# EAGLE board cos POC (EAGLE 9.4.0)
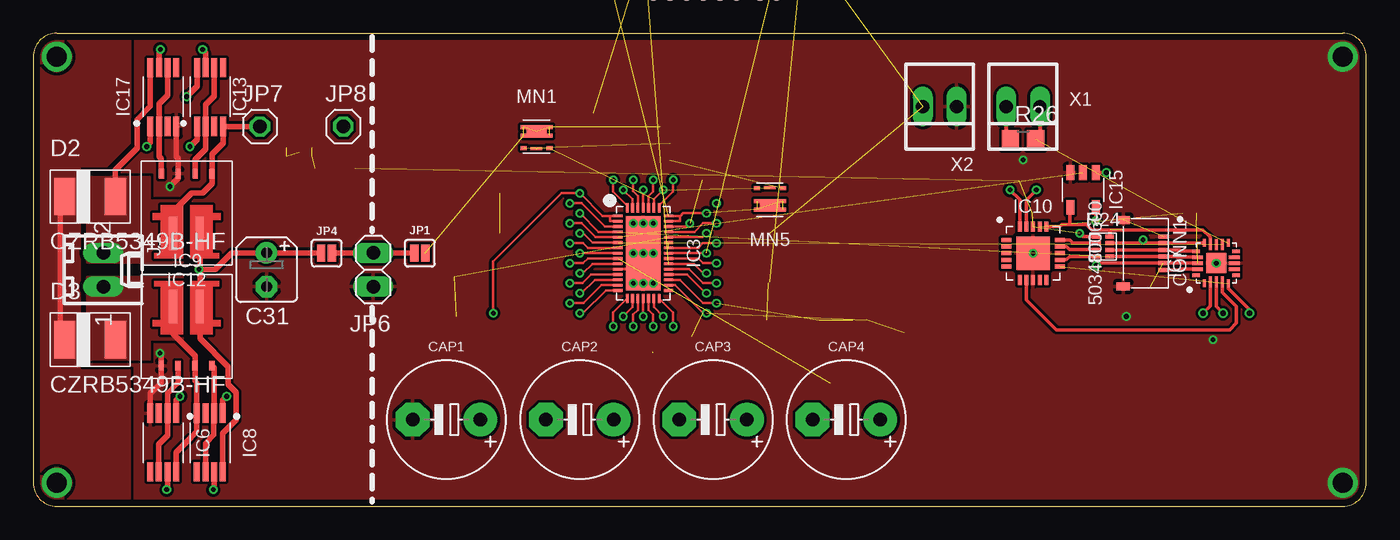
[diagram p0: board, top side]
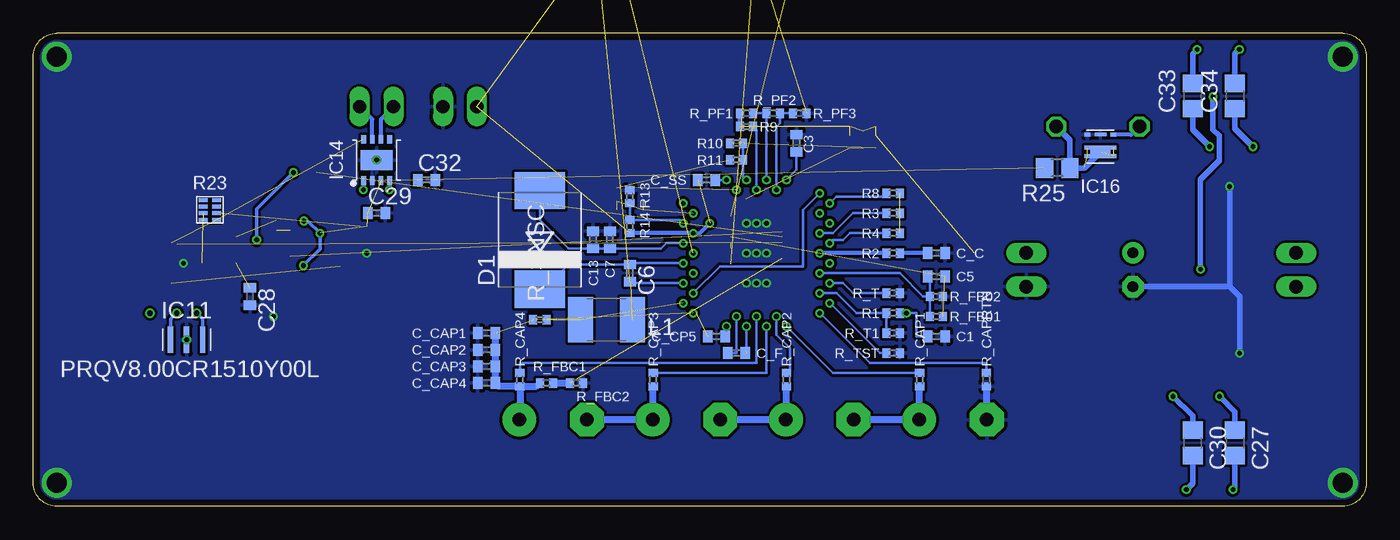
[diagram p1: board, bottom side, seen from below]

Size 100 x 35.5 mm. Coordinates in mm from the lower left corner, seen from the top.
Outline: 1.75,0 98.25,0 arc90 100,1.75 100,33.75 arc90 98.25,35.5 1.75,35.5 arc90 0,33.75 0,1.75 arc90 1.75,0
Copper layers (1*16): Top 0.035mm / dielectric 1.5mm / Bottom 0.035mm
Design rules "markovac_2layer": minimum track width 0.2mm, minimum drill 0.35mm, track to track 0.2mm, track to pad 0.2mm, pad to pad 0.2mm, via to via 0.2mm, smd to smd 0.2mm, copper to edge 0.5mm, drill to drill 8mil, minimum pad ring 0.15mm, minimum via ring 0.15mm, stop-mask expansion 4mil, vias tented up to drill 0.34mm, thermal gap 10mil
Net classes: 0 GND: width 0.3 mm, drill 0.35 mm, clearance 0.2 mm; 1 VCC: width 0.3 mm, drill 0.35 mm, clearance 0.2 mm; 2 signal: width 0.2 mm, drill 0.35 mm, clearance 0.2 mm; 5 currett-0.45: width 0.45 mm, drill 0.35 mm, clearance 0.2 mm

## Footprints (pad centres in the part's own frame; a part is rotated, then mirrored left to right if it is on the bottom)
C0402 = smd 0.7 x 0.9: 1 -0.65,0; 2 0.65,0
C0805 = smd 1.3 x 1.5: 1 -0.95,0; 2 0.95,0
B45181A = drill 0.813 pad 1.6: + -1.27,0 | drill 0.813 pad 1.6 octagon: - 1.27,0
E5-8,5 = drill 1.016 pad 2.54: + -2.54,0 | drill 1.016 pad 2.54 octagon: - 2.54,0
SMT = smd 0.3 x 0.7: 1 -1.25,1.27; 2 -0.75,1.27; 3 -0.25,1.27; 4 0.25,1.27; 5 0.75,1.27; 6 1.25,1.27 | smd 0.6 x 1: GND1 -2.5,-1.73; GND2 2.5,-1.73
SMC = smd 2.8 x 3.8: A 3.7,0; C -3.7,0
DO-214 = smd 1.6 x 2.8: AN 1.9,0; CAT -1.9,0
QFN44 = smd 0.2 x 0.7: 1-CAP_SLCT0 -2.8,-1.9; 2-CAP_SLCT1 -2.4,-1.9; 3-VINGD -2,-1.9; 4-SCL -1.6,-1.9; 5-SDA -1.2,-1.9; 6-!SMBALERT! -0.8,-1.9; 7-CAPGD -0.4,-1.9; 8-VC 0,-1.9; 9-CAPFB 0.4,-1.9; 10-OUTFB 0.8,-1.9; 11SGND 1.2,-1.9; 12-RT 1.6,-1.9; 13-GPI 2,-1.9; 14-ITST 2.4,-1.9; 15-CAPRTN 2.8,-1.9; 23-OUTFET 2.8,1.9; 24-VCAP 2.4,1.9; 25-ICAP 2,1.9; 26-VCC2P5 1.6,1.9; 27-SW 1.2,1.9; 28-TGATE 0.8,1.9; 29-BST 0.4,1.9; 30-BGATE 0,1.9; 31-DRVCC -0.4,1.9; 32-INTVCC -0.8,1.9; 33-VOUT -1.2,1.9; 34-RETRYB -1.6,1.9; 35-ISNSM -2,1.9; 36-ISNSP_CHG -2.4,1.9; 37-ISNS_HS -2.8,1.9 | smd 0.7 x 0.2: 16-CAP1 3.4,-1.2; 17-CAP2 3.4,-0.8; 18-CAP3 3.4,-0.4; 19-CAP4 3.4,0; 20-CFP 3.4,0.4; 21-CFN 3.4,0.8; 22-VCAPP5 3.4,1.2; 38_CSS -3.4,1.2; 39_SRC -3.4,0.8; 40-HS_GATE -3.4,0.4; 41-VIN -3.4,0; 42-UV -3.4,-0.4; 43-OV -3.4,-0.8; 44-CTIMER -3.4,-1.2 | drill 0.35: GND2 -2.25,0.75; GND3 0,0.75; GND4 2.25,0.75; GND5 -2.25,0; GND6 0,0; GND7 2.25,0; GND8 -2.25,-0.75; GND9 0,-0.75; GND10 2.25,-0.75 | smd 5.6 x 2.6: PGND 0,0
VSSOP-8 = smd 0.45 x 1.45: ANODE 0.98,-2.23; CATHODE -0.97,2.17; GATE_DRIVE 0.33,2.17; GATE_PULLD -0.32,-2.23; NC1 0.33,-2.23; NC2 0.98,2.17; VCAPH -0.32,2.17; VCAPL -0.97,-2.23
VQFN-20 = smd 0.55 x 0.25: 1 -1.52,0.9; 5 -1.52,-0.9; 11 1.52,-0.9; 15 1.52,0.9 | smd 0.8 x 0.25: 2 -1.4,0.45; 3 -1.4,0; 4 -1.4,-0.45; 12 1.4,-0.45; 13 1.4,0; 14 1.4,0.45 | smd 0.25 x 0.55: 6 -0.9,-1.48; 10 0.9,-1.48; 16 0.9,1.52; 20 -0.9,1.52 | smd 0.25 x 0.8: 7 -0.45,-1.35; 8 0,-1.35; 9 0.45,-1.35; 17 0.45,1.4; 18 0,1.4; 19 -0.45,1.4 | smd 1.5 x 1.5: GND 0,0
SO-8L = smd 0.58 x 2.5: D1 -1,1.5; D2 1,1.5 | smd 0.4 x 0.7: G1 -0.64,-2.95; G2 1.9,-2.95; S1 -1.91,-2.95; S2 0.63,-2.95
QFN20 = smd 0.3 x 0.75: !CS! 1,2; !RESET! 0.5,2; !RX0BF! 1,-2; !RX1BF! 0.5,-2; GND6 0,-2; OSC1 -0.5,-2; OSC2 -1,-2; RXCAN -1,2; TXCAN -0.5,2; VDD 0,2 | smd 0.75 x 0.3: !INT! 2,-1; !TX0RTS! -2,0.5; !TX1RTS! -2,0; !TX2RTS! -2,-1; CLKOUT -2,1; NC1 -2,-0.5; NC2 2,0; SCK 2,-0.5; SI 2,0.5; SO 2,1 | smd 2.5 x 2.5: GND 0,0
SMT' = smd 0.4 x 2: GND 0,0; XTAL1 -1.2,0; XTAL2 1.2,0
DFN10 = smd 0.35 x 0.65: CANH -0.325,1.55; CANL 0.325,1.55; RXD 0.975,-1.55; SPLIT 0.975,1.55; STBY -0.975,1.55; TXD -0.975,-1.55; VDD 0.325,-1.55; VSS -0.325,-1.55 | smd 2.4 x 1.5: GND 0,0
SOT-23 = smd 1.1 x 0.6: 1 -1.3,0.95; 2 -1.3,0; 3 -1.3,-0.95; 4 1.3,-0.95; 5 1.3,0.95
SC-70-6 = smd 0.45 x 0.3: 1D -0.975,0.725; 2D -0.975,0.075; 3G -0.975,-0.88; 4S 0.975,-0.88; 5D 0.975,0.075; 6D 0.975,0.725 | smd 1.5 x 0.95: D 0,0.4 | smd 0.87 x 0.23: S 0,-0.915
6410-02 = drill 1.016 long: 1 1.27,0; 2 -1.27,0
SMT-JUMPER_2_NO_SILK = smd 0.635 x 1.27: 1 -0.406,0; 2 0.406,0
1X02 = drill 1.016 long: 1 -1.27,0; 2 1.27,0
1X01 = drill 1.016 octagon: 1 0,0
L1812 = smd 1.9 x 3.4: 1 -1.95,0; 2 1.95,0
R0402 = smd 0.6 x 0.7: 1 -0.5,0; 2 0.5,0
0402-4R = smd 0.65 x 0.3: 1 -0.5,-0.75; 2 0.5,-0.75; 3 -0.5,-0.25; 4 0.5,-0.25; 5 -0.5,0.25; 6 0.5,0.25; 7 -0.5,0.75; 8 0.5,0.75
R0805 = smd 1.3 x 1.5: 1 -0.95,0; 2 0.95,0
22-23-2021 = drill 1 long: 1 -1.27,0; 2 1.27,0

## Placement (x,y rotation side)
C1  1μF  [C0402]  32.25,12.75 0 bottom
C3  4.7nF  [C0402]  42.75,27.25 270 bottom
C5  100pF  [C0402]  32.25,17.25 180 bottom
C6  0.1μF  [C0402]  55.25,17.5 270 bottom
C7  0.1μF  [C0402]  56.75,20 90 bottom
C13  4.7μF  [C0402]  58,20 90 bottom
C27  0.1μF  [C0805]  9.84,4.76 270 bottom
C28  0.1μF  [C0402]  83.75,15.75 270 bottom
C29  0.1μF  [C0402]  74.25,22 0 bottom
C30  0.1μF  [C0805]  13.02,4.76 270 bottom
C31  [B45181A]  17.5,17.75 270 top
C32  0.1μF  [C0402]  70.5,24.5 0 bottom
C33  0.1μF  [C0805]  13.02,30.8 90 bottom
C34  0.1μF  [C0805]  9.84,30.8 90 bottom
C_C  4.7nF  [C0402]  32.25,19 0 bottom
C_CAP1  22μF  [C0402]  66,13 180 bottom
C_CAP2  22μF  [C0402]  66,11.75 180 bottom
C_CAP3  22μF  [C0402]  66,10.5 180 bottom
C_CAP4  22μF  [C0402]  66,9.25 180 bottom
C_CP5  1μF  [C0402]  48.75,12.75 0 bottom
C_F  0.1μF  [C0402]  47.25,11.5 180 bottom
C_OUT1-1  100μF  [C0402]  46.5,44.5 270 top  (outside the outline)
C_OUT1-2  100μF  [C0402]  47.75,44.5 270 top  (outside the outline)
C_OUT1-3  100μF  [C0402]  49,44.5 270 top  (outside the outline)
C_OUT1-4  100μF  [C0402]  50.25,44.5 270 top  (outside the outline)
C_OUT1-5  100μF  [C0402]  51.5,44.5 270 top  (outside the outline)
C_OUT1-6  100μF  [C0402]  52.75,44.5 270 top  (outside the outline)
C_OUT2-1  2.2μF  [C0402]  54.5,44.5 270 top  (outside the outline)
C_OUT2-2  2.2μF  [C0402]  55.75,44.5 270 top  (outside the outline)
C_SS  22μF  [C0402]  49.5,24.5 0 bottom
CAP1  15F  [E5-8,5]  31,6.5 180 top
CAP2  15F  [E5-8,5]  41,6.5 180 top
CAP3  15F  [E5-8,5]  51,6.5 180 top
CAP4  15F  [E5-8,5]  61,6.5 180 top
CONN1  5034800600  [SMT]  83.5,19 270 top
D1  [SMC]  62,20 90 bottom
D2  CZRB5349B-HF  [DO-214]  4.25,23.25 0 top
D3  CZRB5349B-HF  [DO-214]  4.25,12.5 0 top
IC3  [QFN44]  45.75,19 270 top
IC6  LM74670QDGKRQ1  [VSSOP-8]  9.75,4.75 180 top
IC7  ATTINY4313-MMH  [VQFN-20]  88.75,18.25 90 top
IC8  LM74670QDGKRQ1  [VSSOP-8]  13.25,4.75 180 top
IC9  SQJ960EP N-FET  [SO-8L]  11.5,13.5 0 top
IC10  MCP2515  [QFN20]  75,19 0 top
IC11  PRQV8.00CR1510Y00L  [SMT']  88.5,12.5 0 bottom
IC12  SQJ960EP N-FET  [SO-8L]  11.5,22 180 top
IC13  LM74670QDGKRQ1  [VSSOP-8]  13.25,30.75 0 top
IC14  MCP2561-2  [DFN10]  74.25,26 0 bottom
IC15  [SOT-23]  78.75,23.75 270 top
IC16  [SC-70-6]  19.94,27 180 bottom
IC17  LM74670QDGKRQ1  [VSSOP-8]  9.75,30.75 0 top
J1  22-27-2021-02  [6410-02]  5.25,17.75 270 top
JP1  JUMPER-SMT_2_NO_SILK  [SMT-JUMPER_2_NO_SILK]  29,19 0 top
JP4  JUMPER-SMT_2_NO_SILK  [SMT-JUMPER_2_NO_SILK]  22,19 0 top
JP6  [1X02]  25.5,17.75 270 top
JP7  [1X01]  17,28.5 0 top
JP8  [1X01]  23.25,28.5 0 top
L1  10μH  [L1812]  57,14 180 bottom
MN1  [SC-70-6]  37.75,27.75 0 top
MN2  [SC-70-6]  44.5,45.75 180 top  (outside the outline)
MN3  [SC-70-6]  57.75,43.75 270 top  (outside the outline)
MN5  [SC-70-6]  55.25,23 180 top
R1  100k  [R0402]  35.5,14.5 180 bottom
R2  2k  [R0402]  35.5,19 0 bottom
R3  10k  [R0402]  35.5,22 180 bottom
R4  10k  [R0402]  35.5,20.5 180 bottom
R8  10k  [R0402]  35.5,23.5 180 bottom
R9  100Ω  [R0402]  46.5,28.5 180 bottom
R10  10Ω  [R0402]  47.25,27.25 0 bottom
R11  10Ω  [R0402]  47.25,26 180 bottom
R13  10k  [R0402]  55.25,23.25 90 bottom
R14  10k  [R0402]  55.25,21 270 bottom
R23  741X083102JP 10k  [0402-4R]  86.75,22.25 0 bottom
R24  741X083331JP 330R  [0402-4R]  80.25,19.5 0 top
R25  330k  [R0805]  23.18,25.4 180 bottom
R26  120  [R0805]  74.25,27.5 0 top
R_CAP1  2.7Ω  [R0402]  33.5,9.5 270 bottom
R_CAP2  2.7Ω  [R0402]  43.5,9.5 270 bottom
R_CAP3  2.7Ω  [R0402]  53.5,9.5 270 bottom
R_CAP4  2.7Ω  [R0402]  63.5,9.5 270 bottom
R_CAPRTN  2.7Ω  [R0402]  28.5,9.5 270 bottom
R_FB01  400k  [R0402]  32.25,14.25 180 bottom
R_FB02  100k  [R0402]  32.25,15.75 0 bottom
R_FBC1  732k  [R0402]  61.5,9.25 180 bottom
R_FBC2  274k  [R0402]  59.25,9.25 180 bottom
R_PF1  30.1k  [R0402]  46.5,29.5 0 bottom
R_PF2  10k  [R0402]  44.5,29.5 0 bottom
R_PF3  30.1k  [R0402]  42.5,29.5 0 bottom
R_SNSC  0.003Ω  [R0402]  62,14 180 bottom
R_SNSI  0.064Ω  [R0402]  42.25,45.5 0 top  (outside the outline)
R_T  88.7k  [R0402]  35.5,16 0 bottom
R_T1  100k THERM  [R0402]  35.5,13 0 bottom
R_TST  20Ω  [R0402]  35.5,11.5 0 bottom
X1  CAN  [22-23-2021]  74.25,30 180 top
X2  BAT  [22-23-2021]  68,30 180 top

## Library data of the parts
C1 C3 C5-C7 C13 C27-C34 C_C C_CAP1-C_CAP4 C_CP5 C_F C_OUT1-1-C_OUT1-6 C_OUT2-1 C_OUT2-2 C_SS CAP1-CAP4 = rcl; SPICEPREFIX: C
CONN1 = 5034800600 FPC Connector
D1 = diode
D2 D3 = zener
IC3 = LTC3351f - Hot Swappable Supercapacitor Charger, Backup Controller and  System Monitor
IC6 IC8 IC13 IC17 = LM74670 - Smart Diode Rectifier Controller
IC7 = ATtiny4313 microcontroller
IC9 IC12 = SQJ96XEP - MosFET
IC10 = MCP2515-I-ML - Standalonce CAN Controller with SPI Interface
IC11 = PRQV8.00CR1510Y00L - 8MHz resonator
IC14 = MCP2561-2 - High-Speed CAN Transceiver
IC15 = TS5A1066 Analogue Switch IC
IC16 MN1-MN3 MN5 = SIA456DJ-T1-GE3  N-Fet
J1 = con-molex; MF: MOLEX; OC_FARNELL: unknown; OC_NEWARK: unknown
JP1 JP4 = SparkFun-Jumpers
JP6-JP8 = pinhead
L1 = rcl; SPICEPREFIX: L
R1-R4 R8-R11 R13 R14 R25 R26 R_CAP1-R_CAP4 R_CAPRTN R_FB01 R_FB02 R_FBC1 R_FBC2 R_PF1-R_PF3 R_SNSC R_SNSI R_T R_T1 R_TST = rcl; SPICEPREFIX: R
R23 R24 = 74x-1133528 Resistor Array
X1 X2 = con-molex; MF: MOLEX; MPN: 22-23-2021; OC_FARNELL: 1462926; OC_NEWARK: 25C3832

## Nets
5V0: C28.1 C29.1 C32.1 CONN1.5 IC7.18 IC10.VDD IC14.VDD IC15.5 R23.1 R23.3 R24.7 R25.2
6V0 [currett-0.45]: C5.1 C_OUT1-1.1 C_OUT1-2.1 C_OUT1-3.1 C_OUT1-4.1 C_OUT1-5.1 C_OUT1-6.1 C_OUT2-1.1 C_OUT2-2.1 C_SS.1 IC3.33-VOUT IC3.35-ISNSM MN2.1D MN2.2D MN2.5D MN2.6D MN2.D R14.2 R_FB01.1 R_SNSI.2 X2.2
!PFO! [signal]: IC3.3-VINGD R8.2
!SMBALERT! [signal]: IC3.6-!SMBALERT! IC7.12 R3.2
BGATE [signal]: IC3.30-BGATE MN3.3G
BST [signal]: C6.1 D1.C IC3.29-BST
CANH: IC14.CANH R26.2 X1.1
CANL: IC14.CANL R26.1 X1.2
CAP1 [signal]: IC3.16-CAP1 R_CAP1.1
CAP2 [signal]: IC3.17-CAP2 R_CAP2.1
CAP3 [signal]: IC3.18-CAP3 R_CAP3.1
CAP4 [signal]: IC3.19-CAP4 R_CAP4.1
CAPFB: IC3.9-CAPFB R_FBC1.1 R_FBC2.2
CAPGD [signal]: IC3.7-CAPGD R4.2
CAPRTN [signal]: IC3.15-CAPRTN R_CAPRTN.1
CFN [signal]: C_F.2 IC3.21-CFN
CFP [signal]: C_F.1 IC3.20-CFP
CKOUT: IC7.4 IC10.OSC1
CSS [signal]: C_SS.2 IC3.38_CSS
CTIMER [signal]: C3.2 IC3.44-CTIMER
DEBUGWIRE/RESET [signal]: CONN1.6 IC7.19
DRVCC [signal]: C7.1 C13.1 D1.A IC3.31-DRVCC IC3.32-INTVCC
DYNAMO_1: D3.AN IC6.CATHODE IC8.ANODE IC9.D1 IC9.S2 J1.1
DYNAMO_2: D2.AN IC12.D2 IC12.S1 IC13.ANODE IC16.3G IC17.CATHODE J1.2 JP7.1
FET1_G: IC6.GATE_DRIVE IC6.GATE_PULLD IC9.G1
FET2_G: IC8.GATE_DRIVE IC8.GATE_PULLD IC9.G2
FET3_G: IC12.G1 IC13.GATE_DRIVE IC13.GATE_PULLD
FET4_G: IC12.G2 IC17.GATE_DRIVE IC17.GATE_PULLD
GND: C1.2 C3.1 C7.2 C13.2 C28.2 C29.2 C31.- C32.2 C_C.2 C_CAP1.2 C_CAP2.2 C_CAP3.2 C_CAP4.2 C_OUT1-1.2 C_OUT1-2.2 C_OUT1-3.2 C_OUT1-4.2 C_OUT1-5.2 C_OUT1-6.2 C_OUT2-1.2 C_OUT2-2.2 CAP1.- CONN1.1 CONN1.GND1 CONN1.GND2 IC3.11SGND IC3.GND2 IC3.GND3 IC3.GND4 IC3.GND5 IC3.GND6 IC3.GND7 IC3.GND8 IC3.GND9 IC3.GND10 IC3.PGND IC6.ANODE IC7.8 IC7.GND IC9.S1 IC10.GND IC10.GND6 IC11.GND IC12.S2 IC14.GND IC14.VSS IC15.3 IC16.4S IC16.S IC17.ANODE JP6.2 MN3.4S MN3.S R13.2 R_CAPRTN.2 R_FB02.2 R_FBC2.1 R_PF3.2 R_T1.2 R_T.2 R_TST.2 X2.1
GPI [signal]: IC3.13-GPI R1.2 R_T1.1
I2C_SDA [signal]: IC3.5-SDA IC15.2
ICAP [signal]: IC3.25-ICAP L1.2 R_SNSC.1
ICSP_DI/MISO [signal]: CONN1.2 IC7.15 IC15.1 R24.6
ICSP_DO/MOSI [signal]: CONN1.3 IC7.16 R24.4
ICSP_SCK [signal]: CONN1.4 IC3.4-SCL IC7.17 R24.2
INT1: IC7.5 IC10.!INT!
ITST [signal]: IC3.14-ITST R_TST.1
N$1 [VCC]: IC3.39_SRC MN1.4S MN1.S MN5.4S MN5.S
N$2: MN1.3G R10.1
N$3: C27.2 IC6.VCAPH
N$4: JP1.1 JP4.2 JP6.1
N$6 [VCC]: IC3.36-ISNSP_CHG IC3.37-ISNS_HS MN5.1D MN5.2D MN5.5D MN5.6D MN5.D R_SNSI.1
N$7 [signal]: CAP3.+ CAP4.- R_CAP3.2
N$8 [signal]: CAP2.+ CAP3.- R_CAP2.2
N$9: C27.1 IC6.VCAPL
N$10: C34.2 IC17.VCAPH
N$11: C34.1 IC17.VCAPL
N$12: C33.1 IC13.VCAPL
N$13: C33.2 IC13.VCAPH
N$14: C30.1 IC8.VCAPL
N$15: C30.2 IC8.VCAPH
N$16 [signal]: CAP1.+ CAP2.- R_CAP1.2
N$18: MN5.3G R11.2
N$19: C_C.1 R2.2
N$20 [signal]: IC3.40-HS_GATE R10.2 R11.1
N$27 [signal]: IC3.41-VIN R9.1
OUT+: C31.+ IC8.CATHODE IC9.D2 IC12.D1 IC13.CATHODE JP4.1
OUTFB [signal]: C5.2 IC3.10-OUTFB R_FB01.2 R_FB02.1
OV [signal]: IC3.43-OV R_PF2.2 R_PF3.1
RESET [signal]: IC10.!RESET! R23.4
RETRYB [signal]: IC3.34-RETRYB R13.1 R14.1
RT [signal]: IC3.12-RT R_T.1
RXCAN: IC10.RXCAN IC14.RXD
SPI_MISO: IC10.SO R24.5
SPI_MOSI: IC10.SI R24.3
SPI_SCK: IC10.SCK R24.1
SPI_SS: IC7.14 IC10.!CS! IC15.4 R24.8
STBY: IC7.11 IC14.STBY R23.2
SW [signal]: C6.2 IC3.27-SW L1.1 MN2.4S MN2.S MN3.1D MN3.2D MN3.5D MN3.6D MN3.D
TGATE [signal]: IC3.28-TGATE MN2.3G
TXCAN: IC10.TXCAN IC14.TXD
UV [signal]: IC3.42-UV R_PF1.2 R_PF2.1
VC [signal]: IC3.8-VC R2.1
VCAP [VCC]: C_CAP1.1 C_CAP2.1 C_CAP3.1 C_CAP4.1 C_CP5.1 CAP4.+ IC3.24-VCAP R_CAP4.2 R_FBC1.2 R_SNSC.2
VCAPP5 [signal]: C_CP5.2 IC3.22-VCAPP5
VCC2P5 [signal]: C1.1 IC3.1-CAP_SLCT0 IC3.2-CAP_SLCT1 IC3.26-VCC2P5 R1.1
VDD: R3.1 R4.1 R8.1
VIN [VCC]: JP1.2 MN1.1D MN1.2D MN1.5D MN1.6D MN1.D R9.2 R_PF1.1
XTAL1: IC7.3 IC11.XTAL1
XTAL2: IC7.2 IC11.XTAL2
ZENER_COMMON: D2.CAT D3.CAT
ZERO_CROSS: IC16.1D IC16.2D IC16.5D IC16.6D IC16.D JP8.1 R25.1

## Tracks (layer width: path | path; a pad name or v marks a point on that pad's centre or on a via)
5V0  (via drill 0.35)  (8 unrouted)
  Top 0.254: IC7.18 CONN1.5 79.92,18.25 v79.75,18.07 | R24.7 78.75,20.25 v78.5,20.5 | IC15.5 v79.7,21.4
  Bottom 0.254: v79.75,18.07 78.5,19.32 v78.5,20.5 79.4,21.4 v79.7,21.4
6V0  (via drill 0.35)  (5 unrouted)
  Top 0.2: IC3.33-VOUT 50.2,20.2 v50.5,20.5 | IC3.35-ISNSM 49,21 v49.25,21.25
  Bottom 0.3: v49.25,21.25 50,20.5 v50.5,20.5 R14.2
  pour Top (no thermals): 43,44.75 43,46 56.25,46 56.25,44.75
!PFO!  (via drill 0.35)
  Top 0.2: v40.25,22.75 41.13,22.75 42.88,21 IC3.3-VINGD
  Bottom 0.2: v40.25,22.75 39.75,23.25 36.25,23.25 R8.2
!SMBALERT!  (via drill 0.35)  (1 unrouted)
  Top 0.2: v41,20.5 41.25,20.5 41.95,19.8 IC3.6-!SMBALERT!
  Bottom 0.2: v41,20.5 40,20.5 38.5,22 R3.2
BGATE  (via drill 0.35)  (1 unrouted)
  Top 0.2: IC3.30-BGATE v50.5,19
BST  (via drill 0.35)
  Top 0.2: IC3.29-BST 49.9,18.6 50.25,18.25 v51.25,18.25
  Bottom 0.2: v51.25,18.25 55.15,18.25 C6.1 59.85,18.15 61.7,16.3 D1.C
CANH
  Top 0.3: X1.1 75.52,27.82 R26.2
  Bottom 0.3: IC14.CANH 74.58,29.05 X1.1
CANL
  Top 0.3: X1.2 72.98,27.82 R26.1
  Bottom 0.3: IC14.CANL 73.92,29.05 X1.2
CAP1  (via drill 0.35)
  Top 0.2: IC3.16-CAP1 43.5,14.55 v43.5,13.5
  Bottom 0.2: v43.5,13.5 40,10 R_CAP1.1
CAP2  (via drill 0.35)
  Top 0.2: IC3.17-CAP2 44.95,14.95 v44.25,14.25
  Bottom 0.2: R_CAP2.1 43.25,10.25 43.25,11.87 44.25,12.87 v44.25,14.25
CAP3  (via drill 0.35)
  Top 0.2: IC3.18-CAP3 45.35,14.73 45,14.38 v45,13.5
  Bottom 0.2: R_CAP3.1 45,10 v45,13.5
CAP4  (via drill 0.35)
  Top 0.2: v45.75,14.25 IC3.19-CAP4
  Bottom 0.2: v45.75,14.25 45.75,10.75 63.5,10.75 R_CAP4.1
CAPFB  (via drill 0.35)  (1 unrouted)
  Top 0.2: IC3.9-CAPFB 41.6,18.6 41.25,18.25 v40.25,18.25
  Bottom 0.508: R_FBC1.1 R_FBC2.2
CAPGD  (via drill 0.35)
  Top 0.2: v40.25,19.75 41.25,19.75 41.6,19.4 IC3.7-CAPGD
  Bottom 0.2: R4.2 38.75,20.5 39.25,20 40,20 v40.25,19.75
CAPRTN  (via drill 0.35)
  Top 0.2: IC3.15-CAPRTN 42.95,16.2 41.25,14.5 v41,14.5
  Bottom 0.2: R_CAPRTN.1 28.5,10.75 37.25,10.75 v41,14.5
CFN  (via drill 0.35)
  Top 0.2: v47.25,14.25 46.55,14.95 IC3.21-CFN
  Bottom 0.2: C_F.2 47.25,11.5 v47.25,14.25
CFP  (via drill 0.35)  (1 unrouted)
  Top 0.2: IC3.20-CFP 46.15,14.73 46.5,14.38 v46.5,13.5
  Bottom 0.2: v46.5,13.5 46.5,11.6 | 46.5,11.5 C_F.1
CKOUT
  Top 0.254: IC7.4 89.2,16.05 90.25,15 90.25,13.75 89.75,13.25 76.75,13.25 74.5,15.5 IC10.OSC1
CSS  (via drill 0.35)
  Top 0.2: IC3.38_CSS 46.95,22.57 48,23.62 v48,24.5
  Bottom 0.2: v48,24.5 C_SS.2
CTIMER  (via drill 0.35)
  Top 0.2: IC3.44-CTIMER 44.55,22.57 43.5,23.62 v43.5,24.5
  Bottom 0.2: v43.5,24.5 43.5,24.53 42.75,25.28 C3.2
DEBUGWIRE/RESET
  Top 0.254: IC7.19 86.05,17.8 86,17.75 CONN1.6
DRVCC  (via drill 0.35)  (1 unrouted)
  Top 0.2: IC3.31-DRVCC 49.9,19.4 50.25,19.75 v51.25,19.75
  Bottom 0.2: v51.25,19.75 52.5,19.75 52.9,19.35 C7.1 C13.1 59.85,19.35 62,21.5 D1.A
DYNAMO_1
  Top 0.4: IC8.ANODE 12.27,5.6 11.83,5.17 | IC9.S2 12.13,9.39 12.27,9.25
  Top 0.406: 12.27,9.25 IC8.ANODE | IC6.CATHODE 10.72,4.05 11.83,5.17 | D3.AN | IC9.S2 12.13,11.3 10.5,12.93 IC9.D1
  pour Top (no thermals): 4,17.25 11.25,17.25 11.25,12.5 8.75,12.5 8.75,11 4,11
DYNAMO_2
  Top 0.4: 8.78,31.34 8.78,30.04 7.78,29.03 7.78,26.88 6.15,25.25
  Top 0.406: 6.2,23.3 D2.AN 6.15,25.25 | IC17.CATHODE 8.78,31.34 | JP7.1 14.25,28.5 IC13.ANODE 14.23,27.25 13.41,26.43 IC12.S1 13.41,24.2 12.7,23.5 11.86,23.5 10.5,22.13 IC12.D2
  Bottom 0.3: JP7.1 17.62,27.88 IC16.3G
  pour Top (no thermals): 4,18.25 11.25,18.25 11.25,23 8.75,23 8.75,24.75 4,24.75
FET1_G
  Top 0.4: IC9.G1 10.86,9.27 10.79,9.21 | 9.42,4.66 10.07,5.31
  Top 0.406: 10.79,9.21 10.07,8.48 IC6.GATE_PULLD 10.07,5.31 | IC6.GATE_DRIVE 9.42,4.66
FET2_G
  Top 0.4: IC8.GATE_PULLD 13.54,6.96 13.54,5.34 12.92,4.71 IC8.GATE_DRIVE
  Top 0.406: IC9.G2 13.57,10.38 IC8.GATE_PULLD 13.57,6.25
FET3_G
  Top 0.4: 13.58,30.8 12.93,30.15 | IC12.G1 12.14,26.01 12.94,26.81 IC13.GATE_PULLD
  Top 0.406: IC13.GATE_DRIVE 13.58,30.8 | 12.93,30.15 IC13.GATE_PULLD
FET4_G
  Top 0.4: IC17.GATE_PULLD 9.43,30.2 9.74,30.51 | IC12.G2 9.6,26.08 9.43,26.25
  Top 0.406: 9.43,26.25 IC17.GATE_PULLD | IC17.GATE_DRIVE 10.08,30.85 9.74,30.51 9.52,30.3
GND  (via drill 0.35, 1.5)  (2 unrouted)
  Top 0.2: IC3.11SGND 44.55,17.8
  Top 0.3: 44.55,17.8 IC3.PGND
  Top 0.4: IC9.S1 9.59,9.27 9.16,8.84 | IC17.ANODE 10.73,26.25 10.87,26.11 IC12.S2 | 10.73,24.48 10.5,24.25
  Top 0.406: IC6.ANODE 8.77,8.45 9.16,8.84 | v9.5,11.5 9.59,11.41 IC9.S1 | 18.11,16.48 C31.- | IC12.S2 10.87,24.62 10.5,24.25 v10.25,24
  Bottom 0.4: 10.25,17.05 10.25,16.5 | C31.- 10.27,16.48 10.25,16.5 | 9.5,15.21 9.5,15.75 10.25,16.5
  Bottom 0.406: v9.5,11.5 9.5,15.21 | v10.25,24 10.25,17.05
  Bottom 0.508: R_CAPRTN.2 28.5,6.54 CAP1.-
  other vias: 82,14.25 88.75,18.25 75,19 88.5,12.5 74.25,26 1.75,33.75 1.75,1.75 98.25,1.75 98.25,33.75
  pour Top (no thermals): 57,44.25 57,42.5 46,42.5 46,44.25
  pour Top (rank 2): 0,35.5 100,35.5 100,0 0,0
  pour Bottom: 0,35.5 100,35.5 100,0 0,0
GPI  (via drill 0.35)
  Top 0.2: IC3.13-GPI 42.13,17 41.13,16 v41,16
  Bottom 0.2: R_T1.1 R1.2 38.25,14.5 39.75,16 v41,16
I2C_SDA  (via drill 0.35)  (1 unrouted)
  Top 0.2: v40.25,21.25 41.13,21.25 42.18,20.2 IC3.5-SDA
ICAP  (via drill 0.35)  (2 unrouted)
  Top 0.2: IC3.25-ICAP 48.5,17 50.25,15.25 v51.25,15.25
ICSP_DI/MISO  (via drill 0.35)
  Top 0.25: IC7.15 84.79,19.77 CONN1.2 83.25,19.75 R24.6
  Top 0.254: v83.25,20 83.25,19.75 | IC15.1 v80.5,25.05
  Bottom 0.254: v80.5,25.05 83.25,22.3 v83.25,20
ICSP_DO/MOSI
  Top 0.25: IC7.16 86.1,19.15 86,19.25 CONN1.3 R24.4
ICSP_SCK  (via drill 0.35)  (1 unrouted)
  Top 0.2: IC3.4-SCL 42.4,20.6 v41,22
  Top 0.25: IC7.17 85.8,18.7 85.75,18.75 CONN1.4 R24.2
INT1  (via drill 0.4)  (1 unrouted)
  Top 0.254: v91.25,14.5 91.25,14.75 89.65,16.35 IC7.5
ITST  (via drill 0.35)
  Top 0.2: IC3.14-ITST 42.63,16.6 41.28,15.25 v40.25,15.25
  Bottom 0.2: v40.25,15.25 36.5,11.5 R_TST.1
N$1  (via drill 0.35)  (4 unrouted)
  Top 0.2: IC3.39_SRC 46.55,23.05 v47.25,23.75
N$2  (1 unrouted)
N$3  (via drill 0.35)
  Top 0.4: IC6.VCAPH 10.07,1.32 v10,1.25
  Bottom 0.4: C27.2 9.84,1.41 v10,1.25
N$4
  Top 0.406: JP4.2 25.48,19 JP6.1 28.57,19.02 JP1.1
N$6  (via drill 0.35)  (6 unrouted)
  Top 0.2: v50.5,22 48.75,22 48.55,21.8 48.5,21.8 | IC3.37-ISNS_HS 48.5,21.8 | IC3.36-ISNSP_CHG 48.5,21.4 48.5,21.8
N$7
  Bottom 0.508: CAP4.- CAP3.+ 53.54,8.96 R_CAP3.2
N$8
  Bottom 0.508: CAP3.- CAP2.+ 43.54,8.96 R_CAP2.2
N$9  (via drill 0.35)
  Top 0.406: v11,8.25 10.72,7.97 IC6.VCAPL
  Bottom 0.406: v11,8.25 9.84,7.09 C27.1
N$10  (via drill 0.35)
  Top 0.4: v9.53,34.29 9.43,34.2 IC17.VCAPH
  Bottom 0.406: v9.53,34.29 9.84,33.97 C34.2
N$11  (via drill 0.35)
  Top 0.406: IC17.VCAPL 8.78,27.28 v8.5,27
  Bottom 0.406: v8.5,27 9.84,28.34 C34.1
N$12  (via drill 0.35)
  Top 0.406: IC13.VCAPL 12.28,27.53 v11.75,27
  Bottom 0.406: v11.75,27 13.02,28.27 C33.1
N$13  (via drill 0.35)
  Top 0.406: v12.7,34.29 12.93,34.06 IC13.VCAPH
  Bottom 0.406: v12.7,34.29 13.02,33.97 C33.2
N$14  (via drill 0.35)
  Top 0.406: v14.5,8.25 14.22,7.97 IC8.VCAPL
  Bottom 0.406: C30.1 13.02,6.77 v14.5,8.25
N$15  (via drill 0.35)
  Top 0.4: IC8.VCAPH 13.57,1.32 v13.5,1.25
  Bottom 0.4: C30.2 13.02,1.73 v13.5,1.25
N$16
  Bottom 0.508: CAP2.- CAP1.+ 33.54,8.96 R_CAP1.2
N$18  (1 unrouted)
N$19
  Bottom 0.3: C_C.1 R2.2
N$20  (via drill 0.35)
  Top 0.2: IC3.40-HS_GATE 46.15,23.27 46.5,23.62 v46.5,24.5
  Bottom 0.2: v46.5,24.5 46.75,24.75 R11.1 R10.2
N$26  (via drill 0.35)
  other vias: 51.25,22.75
N$27  (via drill 0.35)
  Top 0.2: IC3.41-VIN v45.75,23.75
  Bottom 0.2: v45.75,23.75 45.75,28.25 R9.1
OUT+  (via drill 0.35)
  Top 0.4: 14.62,10.25 14.62,9.16 15.22,8.55 15.22,6.47 14.22,5.46 IC8.CATHODE
  Top 0.406: IC12.D1 12.5,17.85 v12.43,17.78 | v12.43,17.78 12.5,17.71 IC9.D2 12.5,12.58 14.62,10.47 14.62,10.25 | v12.43,17.78 13.65,17.78 14.89,19.02 C31.+ 21.57,19.02 JP4.1 | IC13.CATHODE 12.28,31.53 v11.5,30.75
  Bottom 0.4: v11.5,30.75 11.5,28.27 11.03,27.8 11.03,25.94 11.73,25.23
  Bottom 0.406: v12.43,17.78 12.43,24.53 11.73,25.23
OUTFB  (via drill 0.35)
  Top 0.2: v41,17.5 41.25,17.5 41.95,18.2 IC3.10-OUTFB
  Bottom 0.2: v41,17.5 35,17.5 33.25,15.75 R_FB02.1 | R_FB02.1 R_FB01.2 | C5.2 32.75,17.1 R_FB02.1
OV  (via drill 0.35)
  Top 0.2: v44.25,23.75 44.95,23.05 IC3.43-OV
  Bottom 0.2: R_PF3.1 R_PF2.2 44,28.75 44.25,28.5 v44.25,23.75
RESET  (1 unrouted)
RETRYB  (via drill 0.35)
  Top 0.2: IC3.34-RETRYB 49.6,20.6 50.25,21.25 v51.25,21.25
  Bottom 0.2: v51.25,21.25 51.5,21.5 R14.1 R13.1
RT  (via drill 0.35)
  Top 0.2: IC3.12-RT 41.85,17.4 41.2,16.75 v40.25,16.75
  Bottom 0.2: v40.25,16.75 39.25,16.75 38.5,16 R_T.1
RXCAN  (via drill 0.35)
  Top 0.254: IC10.RXCAN 74,23.02 v73.28,23.75
  Bottom 0.254: IC14.RXD v73.28,23.75
SPI_MISO
  Top 0.254: R24.5 79.73,19.77 77.98,19.77 77.75,20 IC10.SO
SPI_MOSI
  Top 0.254: 77.02,19.48 IC10.SI 77.5,19.5 77.73,19.27 79.73,19.27 R24.3
SPI_SCK
  Top 0.254: IC10.SCK 77.02,18.52 77.52,18.52 77.75,18.75 R24.1
SPI_SS  (1 unrouted)
  Top 0.254: R24.8 80.75,20.75 87.75,20.75 88.3,20.2 IC7.14 | 81.75,20.75 79.42,20.75 79.02,21.15 77.75,21.15 | 77.75,21.15 77.15,21.15 77,21 IC10.!CS! | 77.75,21.15 77.75,22.4 IC15.4
STBY  (2 unrouted)
SW  (via drill 0.35)  (8 unrouted)
  Top 0.2: IC3.27-SW 49.2,17.8 50.25,16.75 v51.25,16.75
  Bottom 0.2: v51.25,16.75 55.15,16.75 C6.2
TGATE  (via drill 0.35)  (1 unrouted)
  Top 0.2: IC3.28-TGATE 49.55,18.2 50.25,17.5 v50.5,17.5
TXCAN  (via drill 0.35)
  Top 0.254: IC10.TXCAN 74.5,23 v75.25,23.75
  Bottom 0.254: IC14.TXD 75.22,23.77 v75.25,23.75
UV  (via drill 0.35)
  Top 0.2: v45,24.5 45,23.64 45.35,23.29 IC3.42-UV
  Bottom 0.2: R_PF1.2 R_PF2.1 v45,24.5
VC  (via drill 0.35)
  Top 0.2: v41,19 IC3.8-VC
  Bottom 0.3: R2.1 v41,19
VCAP  (via drill 0.35)  (3 unrouted)
  Top 0.2: IC3.24-VCAP 48.15,16.6 50.25,14.5 v50.5,14.5
  Bottom 0.3: 63.46,8.96 R_CAP4.2
  Bottom 0.508: R_CAP4.2 63.5,6.54 CAP4.+ | C_CAP1.1 C_CAP2.1 C_CAP3.1 C_CAP4.1 65.1,9 R_CAP4.2 | R_CAP4.2 62.25,9 R_FBC1.2
VCAPP5  (via drill 0.35)
  Top 0.2: v48,13.5 48,14.55 IC3.22-VCAPP5
  Bottom 0.2: v48,13.5 48,12.85 C_CP5.2
VCC2P5  (via drill 0.35)
  Top 0.2: 43.25,21.8 42.7,21.8 v41,23.5 39.62,23.5 34.5,18.38 v34.5,14.5 | 43.25,21.8 IC3.1-CAP_SLCT0 | IC3.2-CAP_SLCT1 43.25,21.4 43.25,21.8 | IC3.26-VCC2P5 49.03,17.4 50.43,16 v50.5,16
  Bottom 0.2: R1.1 v34.5,14.5 33.75,14.5 33.75,12.75 C1.1 | v50.5,16 48.5,18 42.25,18 42.25,22.25 v41,23.5
VDD  (2 unrouted)
VIN  (6 unrouted)
  Bottom 0.3: R9.2 R_PF1.1
XTAL1  (via drill 0.4)
  Top 0.254: IC7.3 88.75,15 v89.25,14.5
  Bottom 0.254: IC11.XTAL1 89.7,14.05 v89.25,14.5
XTAL2  (via drill 0.4)
  Top 0.254: IC7.2 88.3,15.05 v87.75,14.5
  Bottom 0.254: IC11.XTAL2 87.3,14.05 v87.75,14.5
ZENER_COMMON
  Top 0.4: D3.CAT 2.02,12.83 2.02,13.78 | D2.CAT 2.02,22.92 2.02,21.5
  Top 0.406: 2.02,21.5 2.02,13.78
  pour Top (isolate 0.254, no thermals): 0,35.42 7.3,35.42 7.3,27.3 5.5,25.5 3.5,25.5 3.5,10.25 7.25,10.25 7.25,0 0,0
ZERO_CROSS  (4 unrouted)
  Bottom 0.406: JP8.1 22.23,27.48 R25.1 21.14,25.4 IC16.D